# EAGLE board Door_scematic v8 (EAGLE 9.7.0)
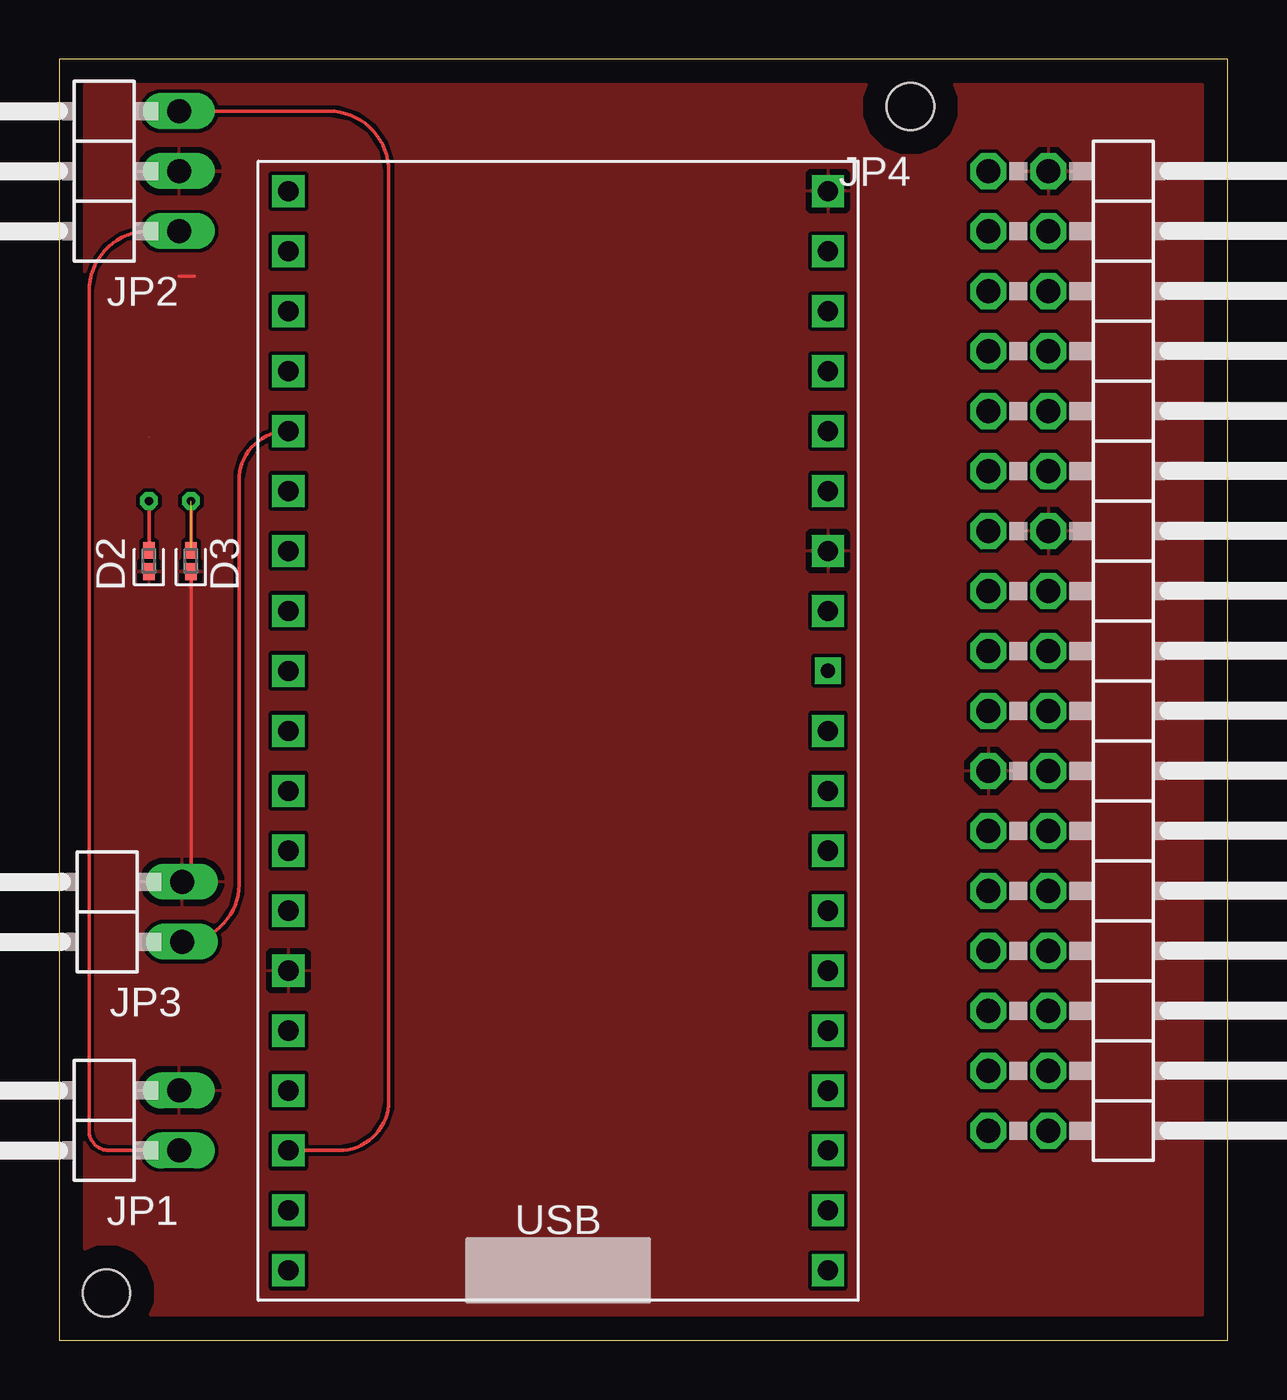
[diagram p0: board, top side]
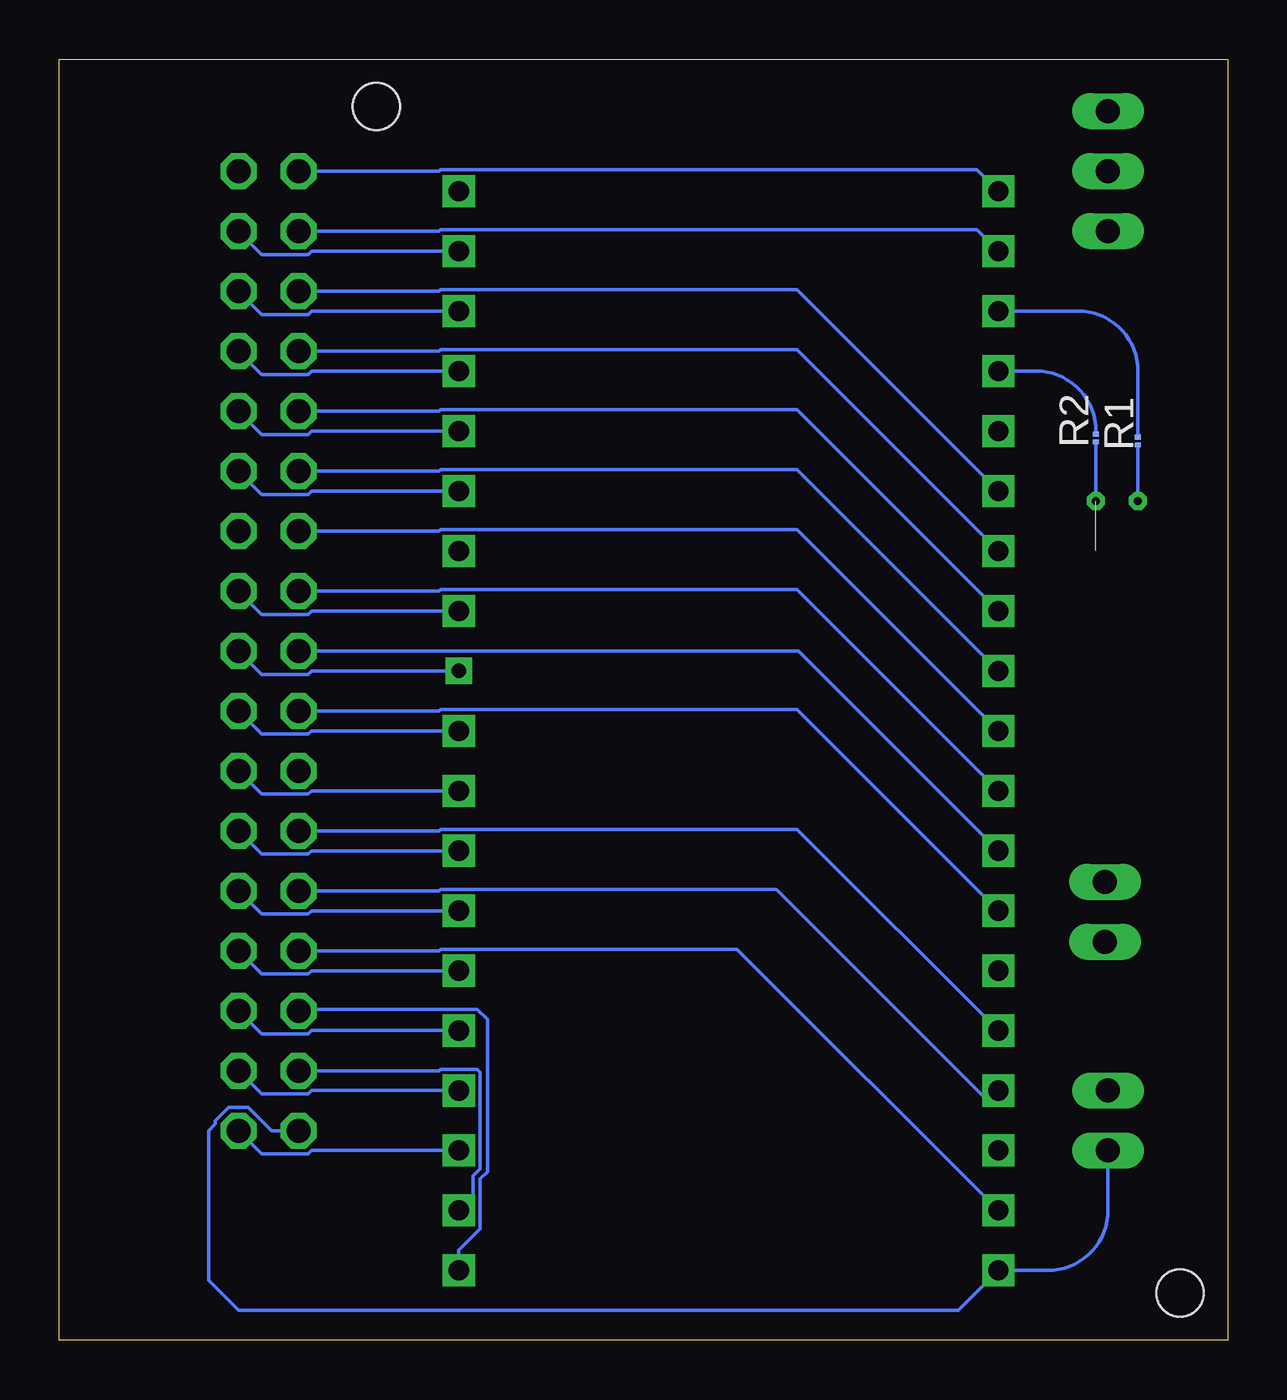
[diagram p1: board, bottom side, seen from below]

Size 49.51 x 54.28 mm. Coordinates in mm from the lower left corner, seen from the top.
Outline: 0,54.28 0,0 49.51,0 49.51,54.28 0,54.28
Copper layers (1*16): Top / Bottom
Stack-up Default Layer Stack: Top User Defined 0.035mm / Dielectric-1 User Defined 1.5mm / Bottom User Defined 0.035mm
Design rules: minimum copper width 6mil, minimum drill size 0.35mm, copper clearance wire_polygon to wire_polygon 6mil, copper clearance wire_polygon to pad_smd 6mil, copper clearance wire_polygon to via 6mil, copper clearance pad_smd to pad_smd 6mil, copper clearance pad_smd to via 6mil, copper clearance via to via 6mil, copper clearance smd to pad (same net) 6mil, copper clearance smd to via (same net) 6mil, copper clearance smd to smd (same net) 6mil, dimension clearance 40mil, restrict clearance 0mil, drill distance 6mil, keepout clearance 0mil
Holes 2 mm at 2.02,2.02 36.06,52.26

## Footprints (pad centres in the part's own frame; a part is rotated, then mirrored left to right if it is on the bottom)
LEDC1005X25N_FLAT-R = smd 0.7 x 0.5: A 0.45,0; C -0.45,0
LEDC1005X25N_FLAT-G = smd 0.7 x 0.5: A 0.45,0; C -0.45,0
1X02/90 = drill 1.016 long: 1 -1.27,-3.81; 2 1.27,-3.81
1X03/90 = drill 1.016 long: 1 -2.54,-3.81; 2 0,-3.81; 3 2.54,-3.81
2X17/90 = drill 1.016 octagon: 1 -20.32,-6.35; 2 -20.32,-3.81; 3 -17.78,-6.35; 4 -17.78,-3.81; 5 -15.24,-6.35; 6 -15.24,-3.81; 7 -12.7,-6.35; 8 -12.7,-3.81; 9 -10.16,-6.35; 10 -10.16,-3.81; 11 -7.62,-6.35; 12 -7.62,-3.81; 13 -5.08,-6.35; 14 -5.08,-3.81; 15 -2.54,-6.35; 16 -2.54,-3.81; 17 0,-6.35; 18 0,-3.81; 19 2.54,-6.35; 20 2.54,-3.81; 21 5.08,-6.35; 22 5.08,-3.81; 23 7.62,-6.35; 24 7.62,-3.81; 25 10.16,-6.35; 26 10.16,-3.81; 27 12.7,-6.35; 28 12.7,-3.81; 29 15.24,-6.35; 30 15.24,-3.81; 31 17.78,-6.35; 32 17.78,-3.81; 33 20.32,-6.35; 34 20.32,-3.81
R01005 = smd 0.2 x 0.25: 1 -0.163,0; 2 0.163,0
ESP32 = drill 0.85 square: 3.3V 1.27,46.99; 5V 1.27,1.27; EN 1.27,44.45; GND1 1.27,13.97; GND2 24.13,46.99; GND3 24.13,31.75; GPIO0 24.13,13.97; GPIO2 24.13,11.43; GPIO4 24.13,16.51; GPIO5 24.13,24.13; GPIO6 24.13,1.27; GPIO7 24.13,3.81; GPIO8 24.13,6.35; GPIO9 1.27,8.89; GPIO10 1.27,6.35; GPIO11 1.27,3.81; GPIO12 1.27,16.51; GPIO13 1.27,11.43; GPIO14 1.27,19.05; GPIO15 24.13,8.89; GPIO16 24.13,19.05; GPIO17 24.13,21.59; GPIO19 24.13,29.21; GPIO21 24.13,34.29; GPIO22 24.13,41.91; GPIO23 24.13,44.45; GPIO25 1.27,26.67; GPIO26 1.27,24.13; GPIO27 1.27,21.59; GPIO32 1.27,31.75; GPIO33 1.27,29.21; GPIO34 1.27,36.83; GPIO35 1.27,34.29; GPIO36 1.27,41.91; GPIO39 1.27,39.37; RX 24.13,36.83; TX 24.13,39.37 | drill 0.6 square: GPIO18 24.13,26.67

## Placement (x,y rotation side)
D2  LED_RED  [LEDC1005X25N_FLAT-R]  3.81,33.02 90 top
D3  LED_GREEN  [LEDC1005X25N_FLAT-G]  5.59,33.02 90 top
JP1  [1X02/90]  1.27,9.32 90 top
JP2  [1X03/90]  1.27,49.53 90 top
JP3  [1X02/90]  1.4,18.16 90 top
JP4  [2X17/90]  45.72,29.21 270 top
R1  [R01005]  3.81,38.1 90 bottom
R2  [R01005]  5.59,38.23 90 bottom
U$1  ESP32  [ESP32]  8.45,1.7 0 top

## Library data of the parts
D2 = LED; CATEGORY: LED; COLOR: RED; DESCRIPTION: CHIP LED FLAT; SUB-CATEGORY: CHIP; TYPE: FLAT_TOP
D3 = LED; CATEGORY: LED; COLOR: GREEN; DESCRIPTION: CHIP LED FLAT; SUB-CATEGORY: CHIP; TYPE: FLAT_TOP
JP1-JP4 = pinhead
R1 R2 = rcl; SPICEPREFIX: R
U$1 = ESP32

## Nets
3V3: JP4.1 U$1.3.3V
+5V: JP1.1 JP2.1 JP4.33 U$1.5V
EN: JP4.3 U$1.EN
GND: D2.C D3.C JP1.2 JP2.2 JP3.2 JP4.2 JP4.14 JP4.21 U$1.GND1 U$1.GND2 U$1.GND3
HALL_EFFECT: JP3.1 U$1.GPIO34
IO0: JP4.28 U$1.GPIO0
IO2: JP4.30 U$1.GPIO2
IO4: JP4.26 U$1.GPIO4
IO5: JP4.20 U$1.GPIO5
IO6: JP4.29 U$1.GPIO6
IO7: JP4.31 U$1.GPIO7
IO8: JP4.34 U$1.GPIO8
IO9: JP4.25 U$1.GPIO9
IO11: JP4.27 U$1.GPIO11
IO12: JP4.19 U$1.GPIO12
IO13: JP4.23 U$1.GPIO13
IO14: JP4.17 U$1.GPIO14
IO15: JP4.32 U$1.GPIO15
IO16: JP4.24 U$1.GPIO16
IO17: JP4.22 U$1.GPIO17
IO18: JP4.18 U$1.GPIO18
IO19: JP4.16 U$1.GPIO19
IO21: JP4.12 U$1.GPIO21
IO22: JP4.6 U$1.GPIO22
IO23: JP4.4 U$1.GPIO23
IO25: JP4.11 U$1.GPIO25
IO26: JP4.13 U$1.GPIO26
IO27: JP4.15 U$1.GPIO27
IO32: JP4.7 U$1.GPIO32
IO33: JP4.9 U$1.GPIO33
IO35: JP4.5 U$1.GPIO35
LED_G: R2.2 U$1.GPIO39
LED_R: R1.2 U$1.GPIO36
N$1: D2.A R1.1
N$4: D3.A R2.1
RELAIS_01: JP2.3 U$1.GPIO10
RX: JP4.10 U$1.RX
TX: JP4.8 U$1.TX

## Tracks (layer width: path | path; a pad name or v marks a point on that pad's centre or on a via)
3V3
  Bottom 0.152: JP4.1 33.41,49.53 33.35,49.59 10.62,49.59 U$1.3.3V
+5V
  Top 0.152: JP1.1 2.11,8.05 arc-90 1.27,8.89 1.27,44.45 arc-90 3.81,46.99 JP2.1
  Bottom 0.152: JP1.1 5.08,5.51 arc90 7.62,2.96 U$1.5V 11.41,1.27 41.91,1.27 43.18,2.54 43.18,8.89 42.9,9.17 42.9,9.3 42.32,9.88 41.5,9.88 40.51,8.89 JP4.33
EN
  Bottom 0.152: JP4.3 33.41,46.99 33.35,47.05 10.62,47.05 U$1.EN
GND
  Top 0.152: 5.71,45.09 5.08,45.09 | D3.C 5.59,19.81
  Bottom 0.152: U$1.GND1 9.71,15.68
  pour Top: -12.7,58.42 -12.7,-3.81 58.42,-3.81 58.42,58.42
HALL_EFFECT
  Top 0.152: JP3.1 arc90 7.62,19.3 7.62,36.43 arc-90 U$1.GPIO34
IO0
  Bottom 0.152: U$1.GPIO0 38.81,15.66 38.96,15.52 40.92,15.52 JP4.28
IO2
  Bottom 0.152: U$1.GPIO2 38.81,13.12 38.96,12.98 40.92,12.98 JP4.30
IO4
  Bottom 0.152: U$1.GPIO4 38.81,18.2 38.96,18.06 40.92,18.06 JP4.26
IO5
  Bottom 0.152: U$1.GPIO5 38.81,25.82 38.96,25.68 40.92,25.68 JP4.20
IO6
  Bottom 0.152: U$1.GPIO6 32.58,3.82 31.67,4.73 31.67,6.84 31.36,7.14 31.36,13.59 31.8,14.03 39.31,14.03 JP4.29
IO7
  Bottom 0.152: JP4.31 33.41,11.43 33.35,11.49 31.8,11.49 31.67,11.36 31.67,7.27 31.97,6.97 31.97,6.11 U$1.GPIO7
IO8
  Bottom 0.152: U$1.GPIO8 38.81,8.04 38.96,7.9 40.92,7.9 JP4.34
IO9
  Bottom 0.152: JP4.25 33.41,19.05 33.35,19.11 19.11,19.11 10.16,10.16 10.14,10.16 U$1.GPIO9
IO11
  Bottom 0.152: JP4.27 33.41,16.51 33.35,16.57 20.78,16.57 U$1.GPIO11
IO12
  Bottom 0.152: JP4.19 33.41,26.67 33.35,26.73 18.24,26.73 U$1.GPIO12
IO13
  Bottom 0.152: JP4.23 33.41,21.59 33.35,21.65 18.24,21.65 U$1.GPIO13
IO14
  Bottom 0.152: JP4.17 18.18,29.21 U$1.GPIO14
IO15
  Bottom 0.152: U$1.GPIO15 38.81,10.58 38.96,10.44 40.92,10.44 JP4.32
IO16
  Bottom 0.152: U$1.GPIO16 38.81,20.75 38.96,20.6 40.92,20.6 JP4.24
IO17
  Bottom 0.152: U$1.GPIO17 38.81,23.29 38.96,23.14 40.92,23.14 JP4.22
IO18
  Bottom 0.152: U$1.GPIO18 38.81,28.36 38.96,28.22 40.92,28.22 JP4.18
IO19
  Bottom 0.152: U$1.GPIO19 38.81,30.91 38.96,30.76 40.92,30.76 JP4.16
IO21
  Bottom 0.152: U$1.GPIO21 38.81,35.99 38.96,35.84 40.92,35.84 JP4.12
IO22
  Bottom 0.152: U$1.GPIO22 38.81,43.61 38.96,43.46 40.92,43.46 JP4.6
IO23
  Bottom 0.152: U$1.GPIO23 38.81,46.15 38.96,46 40.92,46 JP4.4
IO25
  Bottom 0.152: JP4.11 33.41,36.83 33.35,36.89 18.24,36.89 U$1.GPIO25
IO26
  Bottom 0.152: JP4.13 33.41,34.29 33.35,34.35 18.24,34.35 U$1.GPIO26
IO27
  Bottom 0.152: JP4.15 33.41,31.75 33.35,31.81 18.24,31.81 U$1.GPIO27
IO32
  Bottom 0.152: JP4.7 33.41,41.91 33.35,41.97 18.24,41.97 U$1.GPIO32
IO33
  Bottom 0.152: JP4.9 33.41,39.37 33.35,39.43 18.24,39.43 U$1.GPIO33
IO35
  Bottom 0.152: JP4.5 33.41,44.45 33.35,44.51 18.24,44.51 U$1.GPIO35
LED_G
  Bottom 0.152: R2.2 5.59,38.53 arc-90 8.13,41.07 U$1.GPIO39
LED_R  (1 unrouted)
  Bottom 0.152: U$1.GPIO36 6.35,43.61 arc90 3.81,41.07 R1.2
N$1
  Top 0.152: D2.A 3.81,35.56
  Bottom 0.152: R1.1 3.81,36.83 3.81,35.56
N$2  (via drill 0.35)
  other vias: 3.81,35.56
N$3  (via drill 0.35)
  Top 0.152: v5.59,35.56 5.59,33.53
N$4  (1 unrouted)
  Bottom 0.152: R2.1 5.59,35.56
RELAIS_01
  Top 0.152: JP2.3 11.43,52.07 arc-90 13.97,49.53 13.97,10.16 arc-90 11.86,8.04 U$1.GPIO10
RX
  Bottom 0.152: U$1.RX 38.81,38.53 38.96,38.38 40.92,38.38 JP4.10
TX
  Bottom 0.152: U$1.TX 38.81,41.07 38.96,40.92 40.92,40.92 JP4.8